# Altium PCB AT long bus (13.3 x 4.2 inches).PcbDoc
Units mil, origin at the board's own origin, x right, y up, seen from the top; angles counter-clockwise.
Board outline 2086 x 3347 mil, 2 copper layers (TopLayer, BottomLayer), stack 40.6 mil thick; 9 components, 10 nets, 65 pads, 0 vias.
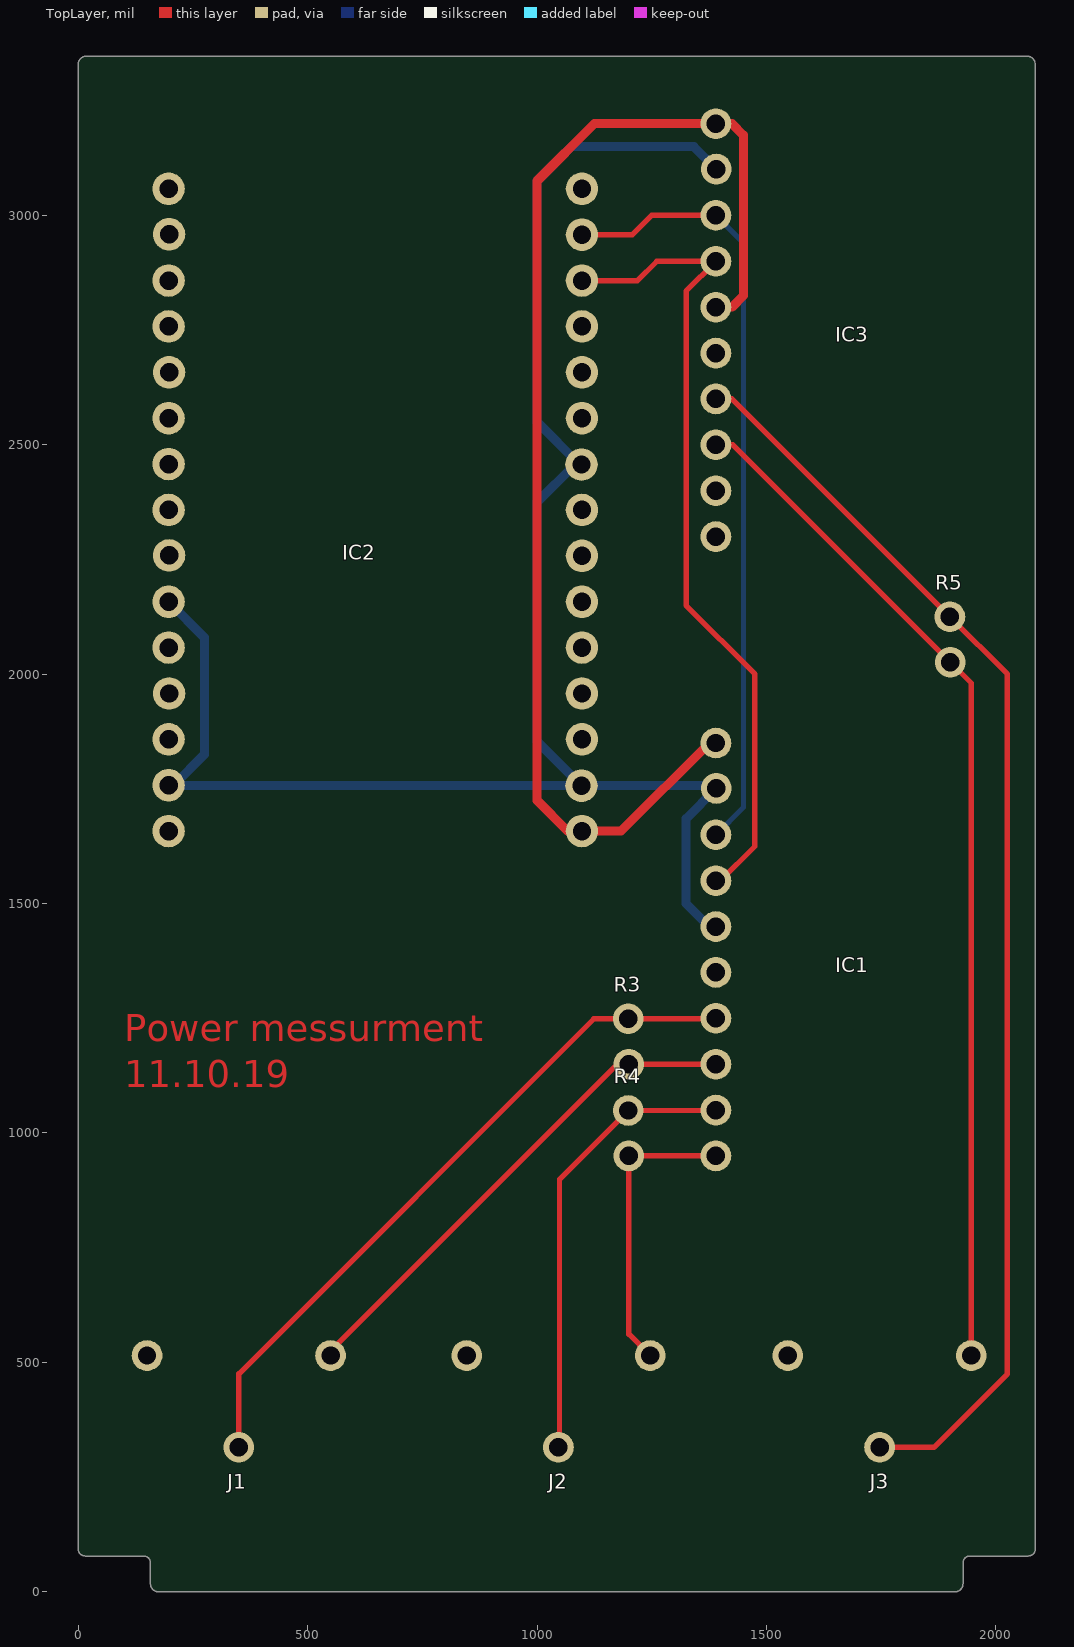
[diagram p0: TopLayer view]
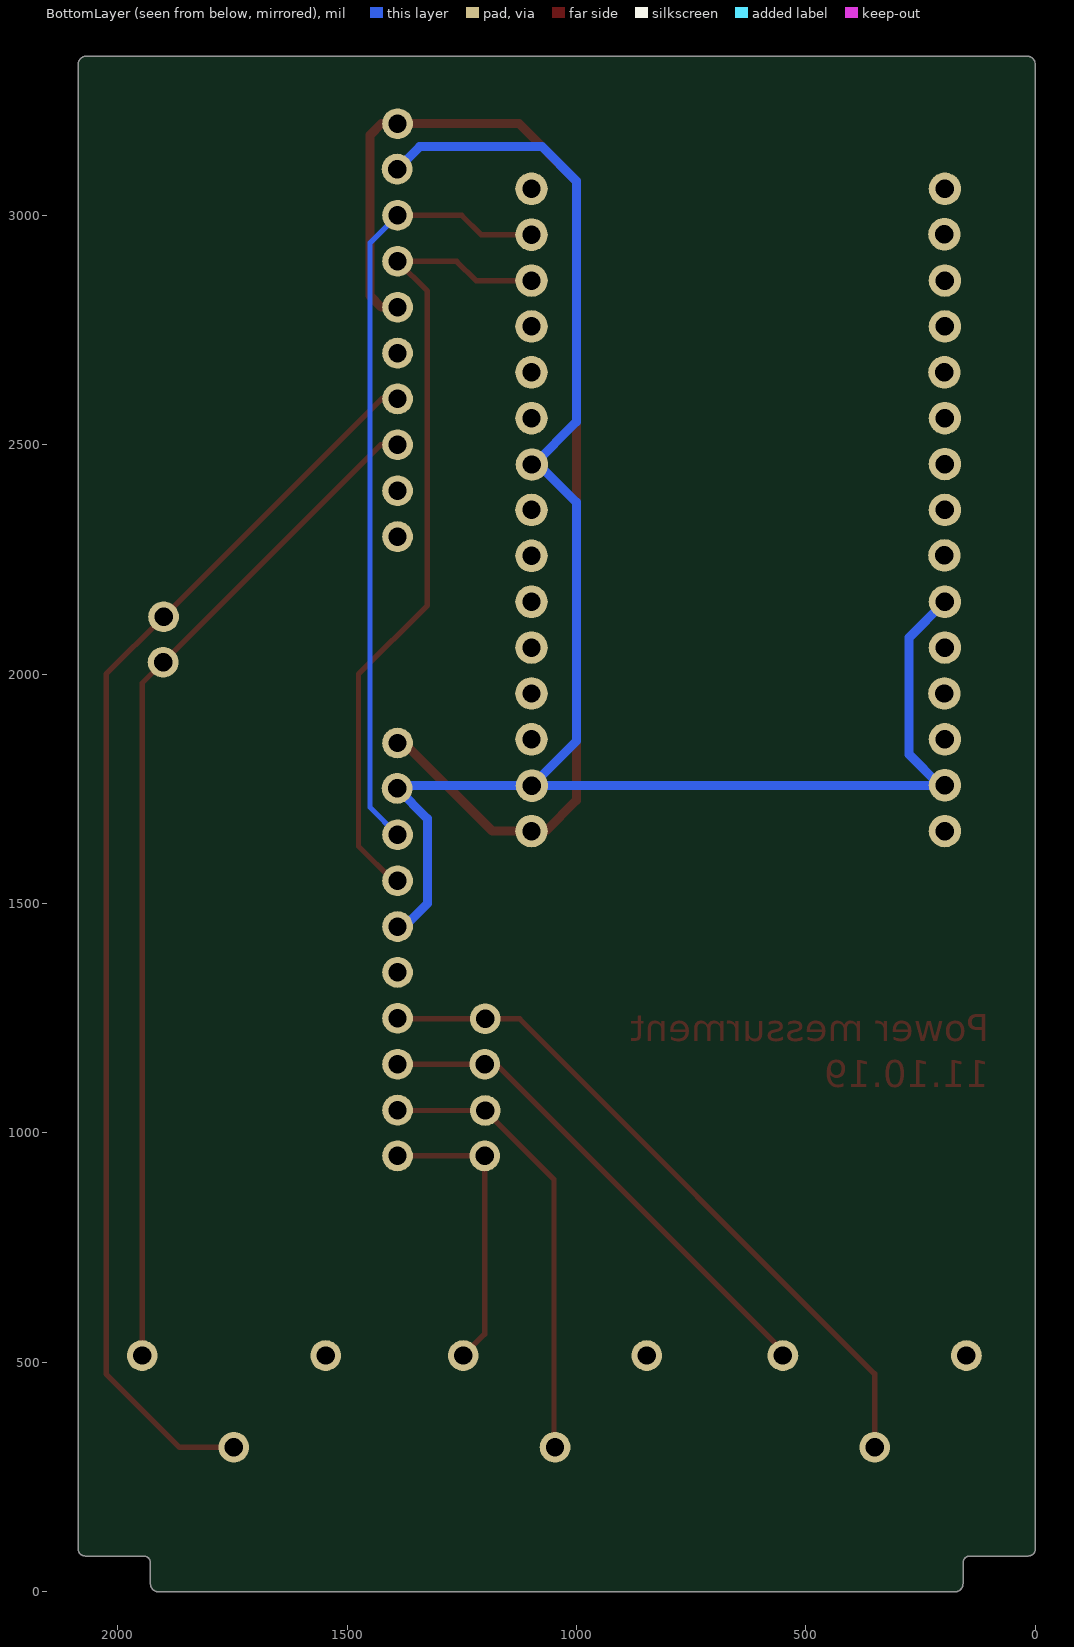
[diagram p1: BottomLayer view, seen from below]

## Layer stack, top to bottom
TopSolder: solder mask 0.4, Solder Resist, Dk 3.5
TopLayer: signal copper 1.4
Dielectric4: prepreg 12.6, FR-4, Dk 4.8
Dielectric5: core 12.6, FR-4, Dk 4.8
Dielectric6: prepreg 12.6, FR-4, Dk 4.8
BottomLayer: signal copper 1.4
BottomSolder: solder mask 0.4, Solder Resist, Dk 3.5

## Board outline
157.48,62.91 ccw(c142.48,62.91) 142.48,77.91 142.48,78 15,78 cw(c15,93) 0,93 0,3329 cw(c18,3329) 18,3347 2068,3347 cw(c2068,3329) 2086,3329 2086,3327 2086,93 cw(c2071,93) 2071,78 1943.52,78 1943.52,77.91 ccw(c1943.52,62.91) 1928.52,62.91 1928.52,17.52 cw(c1911,17.52) 1911,0 175,0 cw(c175,17.52) 157.48,17.52

## Design rules (kind name [scope] priority, off if disabled: settings)
AssemblyTestPointUsage [All] p0: scope1count=1 scope1_0_kind=Board scope1_0_value=Board scope2count=1 scope2_0_kind=Board scope2_0_value=Board commentlength=0
AssemblyTestpoint [All] p0: scope1count=1 scope1_0_kind=Board scope1_0_value=Board scope2count=1 scope2_0_kind=Board scope2_0_value=Board commentlength=0
Clearance [All] p0: scope1count=1 scope1_0_kind=Board scope1_0_value=Board scope2count=1 scope2_0_kind=Board scope2_0_value=Board commentlength=0 gap=10
Clearance [All] p1: gap=10 ignorepadtopadclearanceinfootprint=FALSE except(0: Arc-Hole Track-Hole SMDPad-Hole THPad-Hole Via-Hole Fill-Hole Poly-Hole Region-Hole Text-Hole)
ComponentClearance [All] p0: scope1count=1 scope1_0_kind=Board scope1_0_value=Board scope2count=1 scope2_0_kind=Board scope2_0_value=Board commentlength=0 gap=10 collisioncheckmode=3
DiffPairsRouting [All] p0: scope1count=1 scope1_0_kind=Board scope1_0_value=Board scope2count=1 scope2_0_kind=Board scope2_0_value=Board commentlength=0
FabricationTestPointUsage TestPointUsage [All] p0: scope1count=1 scope1_0_kind=Board scope1_0_value=Board scope2count=1 scope2_0_kind=Board scope2_0_value=Board commentlength=0 valid=0 allowmultiple=FALSE
FabricationTestPointUsage TestPointUsage [All] p1: valid=0 allowmultiple=FALSE
FabricationTestpoint Testpoint [All] p0: scope1count=1 scope1_0_kind=Board scope1_0_value=Board scope2count=1 scope2_0_kind=Board scope2_0_value=Board commentlength=0 side=3 testpointundercomponent=TRUE minsize=40 maxsize=100 preferedsize=60 minholesize=20 maxholesize=40 preferedholesize=32 testpointgrid=1
FabricationTestpoint Testpoint [All] p1: side=3 testpointundercomponent=TRUE minsize=40 maxsize=100 preferedsize=60 minholesize=20 maxholesize=40 preferedholesize=32 testpointgrid=1 allowsidetop=TRUE allowsidebottom=TRUE usegrid=TRUE gridtolerance=0.01
FanoutControl Fanout_BGA [All] p0 off: scope1count=1 scope1_0_kind=Board scope1_0_value=Board scope2count=1 scope2_0_kind=Board scope2_0_value=Board commentlength=69 // Protel DXP Scope 1 Expression Was: IsBGA   Fanout_BGA (Default Rule)
FanoutControl Fanout_LCC [All] p0 off: scope1count=1 scope1_0_kind=Board scope1_0_value=Board scope2count=1 scope2_0_kind=Board scope2_0_value=Board commentlength=69 // Protel DXP Scope 1 Expression Was: IsLCC   Fanout_LCC (Default Rule)
FanoutControl Fanout_SOIC [All] p0 off: scope1count=1 scope1_0_kind=Board scope1_0_value=Board scope2count=1 scope2_0_kind=Board scope2_0_value=Board commentlength=71 // Protel DXP Scope 1 Expression Was: IsSOIC   Fanout_SOIC (Default Rule)
FanoutControl Fanout_Small [All] p0 off: scope1count=1 scope1_0_kind=Board scope1_0_value=Board scope2count=1 scope2_0_kind=Board scope2_0_value=Board commentlength=84 // Protel DXP Scope 1 Expression Was: (CompPinCount < 5)   Fanout_Small (Default Rule)
FanoutControl Fanout_Default [All] p0: scope1count=1 scope1_0_kind=Board scope1_0_value=Board scope2count=1 scope2_0_kind=Board scope2_0_value=Board commentlength=30 // Fanout_Default (Default Rule)
Height [All] p0: scope1count=1 scope1_0_kind=Board scope1_0_value=Board scope2count=1 scope2_0_kind=Board scope2_0_value=Board commentlength=0
HoleSize [All] p0: scope1count=1 scope1_0_kind=Board scope1_0_value=Board scope2count=1 scope2_0_kind=Board scope2_0_value=Board commentlength=0 absolutevalues=TRUE maxlimit=100 minlimit=1 maxpercent=80.000 minpercent=20.000
HoleToHoleClearance [All] p0: scope1count=1 scope1_0_kind=Board scope1_0_value=Board scope2count=1 scope2_0_kind=Board scope2_0_value=Board commentlength=0
LayerPairs [All] p0: scope1count=1 scope1_0_kind=Board scope1_0_value=Board scope2count=1 scope2_0_kind=Board scope2_0_value=Board commentlength=0 enforce=TRUE
MinimumSolderMaskSliver [All] p0: scope1count=1 scope1_0_kind=Board scope1_0_value=Board scope2count=1 scope2_0_kind=Board scope2_0_value=Board commentlength=0
NetAntennae [All] p0: scope1count=1 scope1_0_kind=Board scope1_0_value=Board scope2count=1 scope2_0_kind=Board scope2_0_value=Board commentlength=0
PasteMaskExpansion PasteMaskExpansion_1 [All] p0: scope1count=1 scope1_0_kind=Component scope1_0_value=P1 scope2count=1 scope2_0_kind=Board scope2_0_value=Board commentlength=0 expansion=-150
PasteMaskExpansion [All] p0: scope1count=1 scope1_0_kind=Board scope1_0_value=Board scope2count=1 scope2_0_kind=Board scope2_0_value=Board commentlength=0 expansion=0
PasteMaskExpansion PasteMaskExpansion_1 [InComponent('P1')] p1: expansion=-150
PasteMaskExpansion [All] p2: expansion=0
PlaneClearance [All] p0: scope1count=1 scope1_0_kind=Board scope1_0_value=Board scope2count=1 scope2_0_kind=Board scope2_0_value=Board commentlength=0 clearance=10
PlaneClearance [All] p1: clearance=10
PlaneConnect [All] p0: scope1count=1 scope1_0_kind=Board scope1_0_value=Board scope2count=1 scope2_0_kind=Board scope2_0_value=Board commentlength=0 planeconnectstyle=Relief reliefexpansion=20 reliefentries=4 reliefconductorwidth=10 reliefairgap=10
PolygonConnect [All] p0: scope1count=1 scope1_0_kind=Board scope1_0_value=Board scope2count=1 scope2_0_kind=Board scope2_0_value=Board commentlength=0 connectstyle=Relief reliefconductorwidth=10 reliefentries=4 polygonreliefangle="90 Angle"
PolygonConnect [All] p1: connectstyle=Relief reliefconductorwidth=10 reliefentries=4 polygonreliefangle="90 Angle" airgapwidth=10
RoutingCorners [All] p0: scope1count=1 scope1_0_kind=Board scope1_0_value=Board scope2count=1 scope2_0_kind=Board scope2_0_value=Board commentlength=0 cornerstyle=45-Degree minsetback=100 maxsetback=100
RoutingLayers [All] p0: scope1count=1 scope1_0_kind=Board scope1_0_value=Board scope2count=1 scope2_0_kind=Board scope2_0_value=Board commentlength=0 top layer=Horizontal bottom layer=Vertical
RoutingPriority [All] p0: scope1count=1 scope1_0_kind=Board scope1_0_value=Board scope2count=1 scope2_0_kind=Board scope2_0_value=Board commentlength=0
RoutingTopology [All] p0: scope1count=1 scope1_0_kind=Board scope1_0_value=Board scope2count=1 scope2_0_kind=Board scope2_0_value=Board commentlength=0 topology=Shortest
RoutingVias [All] p0: scope1count=1 scope1_0_kind=Board scope1_0_value=Board scope2count=1 scope2_0_kind=Board scope2_0_value=Board commentlength=0 holewidth=28 width=50 viastyle="Through Hole" minholewidth=28 minwidth=50 maxholewidth=28 maxwidth=50
RoutingVias [All] p1: holewidth=28 width=50 viastyle="Through Hole" minholewidth=28 minwidth=50 maxholewidth=28 maxwidth=50
ShortCircuit [All] p0: scope1count=1 scope1_0_kind=Board scope1_0_value=Board scope2count=1 scope2_0_kind=Board scope2_0_value=Board commentlength=0 allowed=FALSE
SilkToBoardRegionClearance [All] p0: scope1count=1 scope1_0_kind=Board scope1_0_value=Board scope2count=1 scope2_0_kind=Board scope2_0_value=Board commentlength=0
SilkToSilkClearance [All] p0: scope1count=1 scope1_0_kind=Board scope1_0_value=Board scope2count=1 scope2_0_kind=Board scope2_0_value=Board commentlength=0
SilkToSolderMaskClearance SilkscreenOverComponentPads [All] p0 off: scope1count=1 scope1_0_kind=Board scope1_0_value=Board scope2count=1 scope2_0_kind=Board scope2_0_value=Board commentlength=44 // Protel DXP Scope 1 Expression Was: IsPad
SilkToSolderMaskClearance SilkscreenOverComponentPads [IsPad] p1: minsilkscreentomaskgap=10 clearancetoexposedcopper=TRUE
SolderMaskExpansion [All] p0: scope1count=1 scope1_0_kind=Board scope1_0_value=Board scope2count=1 scope2_0_kind=Board scope2_0_value=Board commentlength=0 expansion=2
SolderMaskExpansion [All] p1: expansion=2
UnRoutedNet [All] p0: scope1count=1 scope1_0_kind=Board scope1_0_value=Board scope2count=1 scope2_0_kind=Board scope2_0_value=Board commentlength=0
UnpouredPolygon [All] p0: scope1count=1 scope1_0_kind=Board scope1_0_value=Board scope2count=1 scope2_0_kind=Board scope2_0_value=Board commentlength=0
Width [All] p0: scope1count=1 scope1_0_kind=Board scope1_0_value=Board scope2count=1 scope2_0_kind=Board scope2_0_value=Board commentlength=0 maxlimit=20 minlimit=5 preferedwidth=10
Width [All] p1: maxlimit=20 minlimit=5 preferedwidth=10 minimp=50.000000 maximp=50.000000 favimp=50.000000
25 further rules are at their usual default settings.

## Components (designator, comment, footprint, x,y, rotation, side; value= is the part's Value field where it differs from the comment)
IC1 "ADS1115" ADS1115 1650,1400 r270 top locked
IC2 "" ESP8266 650,2350 r0 top locked
IC3 "ADS1115" ADS1115 1650,2750 r270 top locked
J1 "si7021" "3,5mm Jack" 350,314.96 r0 top locked
J2 "si7021" "3,5mm Jack" 1046.69,314.96 r0 top locked
J3 "si7021" "3,5mm Jack" 1746.69,314.96 r0 top locked
R3 "220E" 220E 940,1600 r90 top
R4 "220E" 220E 940,1400 r90 top
R5 "220E" 220E 1641,2476 r90 top

## Footprints (in the part's own frame and the unit in brackets; to place one, negate y for a bottom-side part, rotate by r counter-clockwise, add the part's x,y. Pads: shape width x height; smd on the part's side, far side on the other; paste and mask are expansions set on the pad)
"3,5mm Jack" [mm]
  round 1.7 hole 1.02: 1(5.08,5.08) 2(0,0) 3(-5.08,5.08)
220E [mm]
  round 1.7 hole 1.02: 1(-11.43,-6.604) 2(-8.915,-6.579)
ADS1115 [mm]
  round 1.7 hole 1.02: 1(-11.43,-6.604) 2(-8.915,-6.579) 3(-6.35,-6.604) 4(-3.81,-6.604) 5(-1.27,-6.604) 6(1.27,-6.604) 7(3.81,-6.604) 8(6.35,-6.604) 9(8.89,-6.604) 10(11.43,-6.604)
ESP8266 [mm]
  round 1.8 hole 1.02: 1(-11.506,17.983) 2(-11.481,15.469) 3(-11.506,12.903) 4(-11.506,10.363) 5(-11.481,7.823) 6(-11.506,5.283) 7(-11.506,2.743) 8(-11.506,0.203) 9(-11.481,-2.311) 10(-11.506,-4.877) 11(-11.506,-7.417) 12(-11.481,-9.957) 13(-11.506,-12.497) 14(-11.506,-15.037) 15(-11.506,-17.577) 16(11.379,-17.577) 17(11.354,-15.062) 18(11.379,-12.497) 19(11.379,-9.957) 20(11.379,-7.417) 21(11.379,-4.877) 22(11.379,-2.337) 23(11.379,0.203) 24(11.354,2.718) 25(11.379,5.283) 26(11.379,7.823) 27(11.379,10.363) 28(11.379,12.903) 29(11.379,15.443) 30(11.379,17.983)

## Part data
IC2: library part ESP8266
J1 J2 J3: library part "3,5mm Jack"

## Nets (pads, with @x,y where several pads share a name; then routed paths per layer and width w, separated by ;. In a path a pad name is that pad's centre, name@x,y a point inside that pad or via, vN(x,y) a via of type N, cw(c..) or ccw(c..) an arc to the next point about the centre after c; other vN are vias at no path point)
NetIC1_1: IC1.1 IC2.16 IC3.1 IC3.5 | length 2794.8
  TopLayer w19.68: IC2.16@1098,1673 IC2.16 ; IC1.1 1375,1850 1183,1658 IC2.16 ; IC3.5 1425,2800 1450,2825 1450,3175 1425,3200 IC3.1 1125,3200 1000,3075 1000,1725 1067,1658 IC2.16
NetIC1_2: IC1.2 IC1.5 IC2.10 IC2.14 IC2.17 IC2.24 IC3.2 | length 3920
  BottomLayer w19.68: IC2.10 275,2080 275,1825 208,1758 IC2.14 198,1757 IC2.17 ; IC2.24 IC2.24@1093,2457 ; IC1.5 1375,1450 1325,1500 1325,1685 IC1.2 1385,1757 IC2.17 ; IC3.2 1342,3150 1075,3150 1000,3075 1000,2550 IC2.24@1093,2457 ; IC2.24@1093,2457 1082,2457 1000,2375 1000,1854 IC2.17
NetIC1_3: IC1.3 IC2.29 IC3.3 | length 1709.1
  TopLayer w11.81: IC2.29 1208,2958 1250,3000 IC3.3
  BottomLayer w11.81: IC1.3 1450,1710 1450,2940 IC3.3
NetIC1_4: IC1.4 IC2.28 IC3.4 | length 1789.5
  TopLayer w11.81: IC2.28 1219,2858 1261,2900 IC3.4 1325,2835 1325,2150 1475,2000 1475,1625 1400,1550 IC1.4
NetIC1_7: IC1.7 J1.2 R3.2 | length 1522.5
  TopLayer w11.81: J1.2 350,475 1124,1249 R3.2 ; R3.2@1200,1250 R3.2 ; IC1.7 1389,1249 R3.2
NetIC1_8: IC1.8 J1.1 R3.1 | length 1108.9
  TopLayer w11.81: J1.1 550,525 1175,1150 R3.1 IC1.8
NetIC1_9: IC1.9 J2.2 R4.2 | length 988.5
  TopLayer w11.81: J2.2 1049,317.27 1049,899 R4.2 1389,1049 IC1.9
NetIC1_10: IC1.10 J2.1 R4.1 | length 644.4
  TopLayer w11.81: J2.1 1200,561.65 R4.1 IC1.10
NetIC3_7: IC3.7 J3.2 R5.2 | length 2753.1
  TopLayer w11.81: IC3.7 1425,2600 R5.2 2025,2000 2025,475 1864.96,314.96 J3.2
NetIC3_8: IC3.8 J3.1 R5.1 | length 2237.3
  TopLayer w11.81: IC3.8 1427,2500 R5.1 1946.69,1980.31 J3.1
pads on no net: IC1.6 IC2.1 IC2.2 IC2.3 IC2.4 IC2.5 IC2.6 IC2.7 IC2.8 IC2.9 IC2.11 IC2.12 IC2.13 IC2.15 IC2.18 IC2.19 IC2.20 IC2.21 IC2.22 IC2.23 IC2.25 IC2.26 IC2.27 IC2.30 IC3.6 IC3.9 IC3.10 J1.3 J2.3 J3.3

## Other copper
TopLayer:
  text "Power messurment" at 100,1200 h59.06
  text "11.10.19" at 100,1100 h59.06

## Silkscreen, mask and mechanical layers (free items; w line width, h text height)
Mechanical1:
  lines w3.94: 142.48,77.91 cw(c142.48,62.91) 157.48,62.91 157.48,17.52 ccw(c175,17.52) 175,0 1911,0 ccw(c1911,17.52) 1928.52,17.52 1928.52,62.91 cw(c1943.52,62.91) 1943.52,77.91 ; 142.48,78 21,78 15,78 cw(c15,93) 0,93 0,3329 cw(c18,3329) 18,3347 2068,3347 cw(c2068,3329) 2086,3329 2086,3327 2086,93 cw(c2071,93) 2071,78 2065,78 1943.52,78
Mechanical3:
  lines w3.94: 2042,691 2088,691 ; 1394.49,0 1396.69,0 ; 1394.49,0 1396.69,0 ; 1394.49,0 1396.69,0

## Text inside footprints (layer, text, board x,y; h text height)
IC2: Mechanical1 "ESP8266" at 56.5,1310.5 h31.5